# EAGLE board untitled (EAGLE 9.5.2)
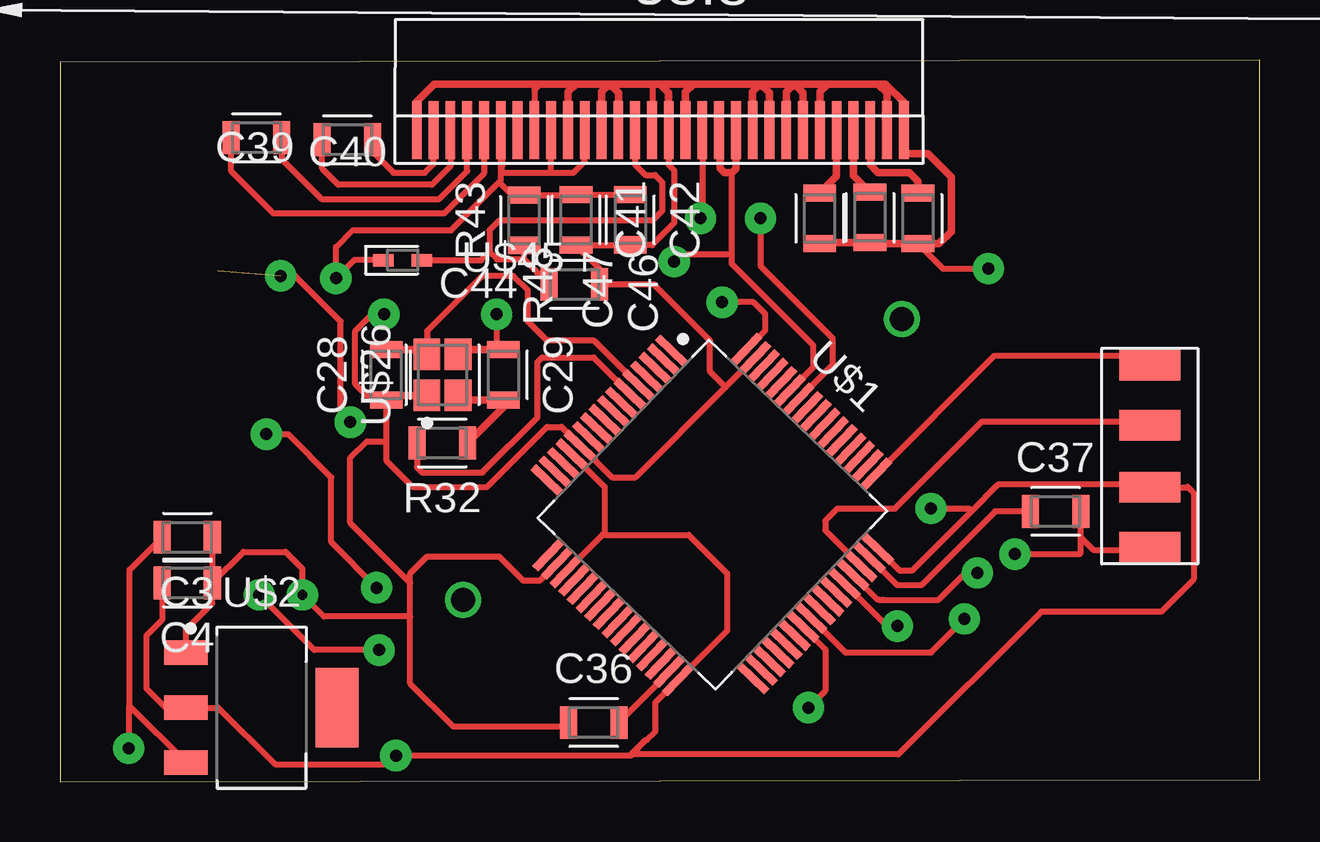
[diagram p0: board, top side]
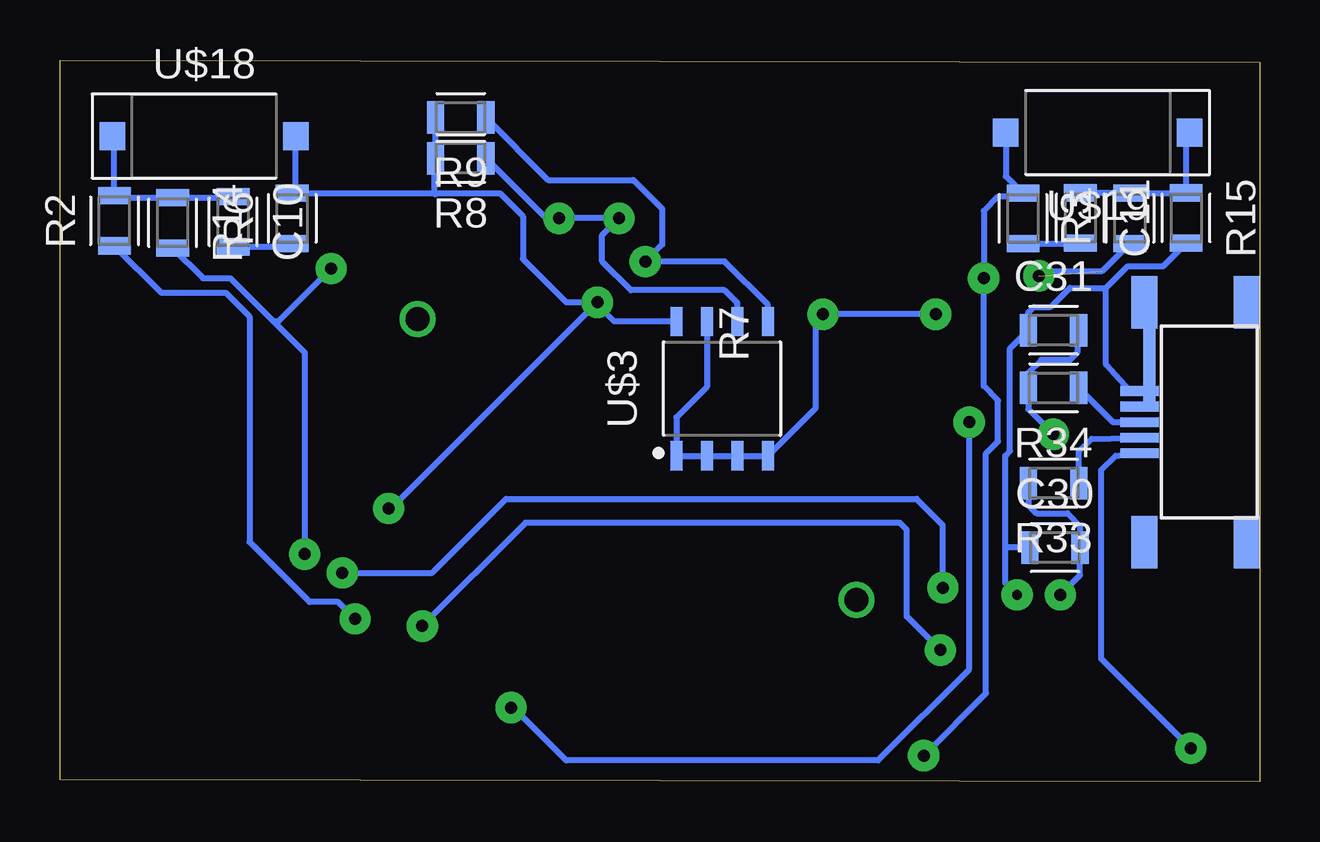
[diagram p1: board, bottom side, seen from below]

Size 50 x 30.1 mm. Coordinates in mm from the lower left corner, seen from the top.
Outline: 0,0 50,0.1 50,30.1 0,30 0,0
Copper layers (1*16): Top 0.035mm / dielectric 1.5mm / Bottom 0.035mm
Design rules "default": minimum track width 6mil, minimum drill 0.35mm, track to track 6mil, track to pad 6mil, pad to pad 6mil, via to via 6mil, smd to smd 6mil, copper to edge 40mil, drill to drill 6mil, minimum pad ring 10mil, minimum via ring 8mil, stop-mask expansion 4mil, vias tented up to drill 0mil, thermal gap 10mil

## Footprints (pad centres in the part's own frame; a part is rotated, then mirrored left to right if it is on the bottom)
0805 = smd 0.712 x 1.362: 1 -1.05,0; 2 1.05,0
QFP64 = smd 1.592 x 0.332: 1 -5.96,3.75; 2 -5.96,3.25; 3 -5.96,2.75; 4 -5.96,2.25; 5 -5.96,1.75; 6 -5.96,1.25; 7 -5.96,0.75; 8 -5.96,0.25; 9 -5.96,-0.25; 10 -5.96,-0.75; 11 -5.96,-1.25; 12 -5.96,-1.75; 13 -5.96,-2.25; 14 -5.96,-2.75; 15 -5.96,-3.25; 16 -5.96,-3.75; 33 5.96,-3.75; 34 5.96,-3.25; 35 5.96,-2.75; 36 5.96,-2.25; 37 5.96,-1.75; 38 5.96,-1.25; 39 5.96,-0.75; 40 5.96,-0.25; 41 5.96,0.25; 42 5.96,0.75; 43 5.96,1.25; 44 5.96,1.75; 45 5.96,2.25; 46 5.96,2.75; 47 5.96,3.25; 48 5.96,3.75 | smd 0.332 x 1.592: 17 -3.75,-5.96; 18 -3.25,-5.96; 19 -2.75,-5.96; 20 -2.25,-5.96; 21 -1.75,-5.96; 22 -1.25,-5.96; 23 -0.75,-5.96; 24 -0.25,-5.96; 25 0.25,-5.96; 26 0.75,-5.96; 27 1.25,-5.96; 28 1.75,-5.96; 29 2.25,-5.96; 30 2.75,-5.96; 31 3.25,-5.96; 32 3.75,-5.96; 49 3.75,5.96; 50 3.25,5.96; 51 2.75,5.96; 52 2.25,5.96; 53 1.75,5.96; 54 1.25,5.96; 55 0.75,5.96; 56 0.25,5.96; 57 -0.25,5.96; 58 -0.75,5.96; 59 -1.25,5.96; 60 -1.75,5.96; 61 -2.25,5.96; 62 -2.75,5.96; 63 -3.25,5.96; 64 -3.75,5.96
SOT229P729X180-4N = smd 1.803 x 1.012: 1 -3.15,2.29; 2 -3.15,0; 3 -3.15,-2.29 | smd 1.803 x 3.322: 4 3.15,0
SOIC127P600X175-8N = smd 1.212 x 0.502: 1 -2.8,1.905; 2 -2.8,0.635; 3 -2.8,-0.635; 4 -2.8,-1.905; 5 2.8,-1.905; 6 2.8,-0.635; 7 2.8,0.635; 8 2.8,1.905
USBT = smd 2.184 x 1.067: P$1 5,1.57; P$2 -5,1.57; P$3 -5,-2.7; P$4 5,-2.7 | smd 0.406 x 0.813: P$5 0,-2.5; P$6 -0.65,-2.5; P$7 0.65,-2.5; P$8 1.3,-2.5; P$9 -1.3,-2.5; P$10 0,-3.3; P$11 -0.65,-3.3; P$12 -1.3,-3.3; P$13 0.65,-3.3; P$14 1.3,-3.3 | smd 1.016 x 0.508: P$15 -1.35,-2.5; P$16 -2.35,-2.5; P$17 -3.35,-2.5; P$18 -4.1,-2.5
BUTTON = smd 1.062 x 1.172: 1 -3.825,0; 2 3.825,0
NX2520SA = smd 1.312 x 1.112: 1 -0.85,0.65; 2 -0.85,-0.65; 3 0.85,-0.65; 4 0.85,0.65
SSD1306 = smd 0.406 x 0.813: 1 -10.1,-0.4; 2 -9.4,-0.4; 3 -8.7,-0.4; 4 -8,-0.4; 5 -7.3,-0.4; 6 -6.6,-0.4; 7 -5.9,-0.4; 8 -5.2,-0.4; 9 -4.5,-0.4; 10 -3.8,-0.4; 11 -3.1,-0.4; 12 -2.4,-0.4; 13 -1.7,-0.4; 14 -1,-0.4; 15 -0.3,-0.4; 16 0.4,-0.4; 17 1.1,-0.4; 18 1.8,-0.4; 19 2.5,-0.4; 20 3.2,-0.4; 21 3.9,-0.4; 22 4.6,-0.4; 23 5.3,-0.4; 24 6,-0.4; 25 6.7,-0.4; 26 7.4,-0.4; 27 8.1,-0.4; 28 8.8,-0.4; 29 9.5,-0.4; 30 10.2,-0.4; P$1 -10.1,0.4; P$2 -9.4,0.4; P$3 -8.7,0.4; P$4 -8,0.4; P$5 -7.3,0.4; P$6 -6.6,0.4; P$7 -5.9,0.4; P$8 -5.2,0.4; P$9 -4.5,0.4; P$10 -3.8,0.4; P$11 -3.1,0.4; P$12 -2.4,0.4; P$13 -1.7,0.4; P$14 -1,0.4; P$15 -0.3,0.4; P$16 0.4,0.4; P$17 1.1,0.4; P$18 1.8,0.4; P$19 2.5,0.4; P$20 3.2,0.4; P$21 3.9,0.4; P$22 4.6,0.4; P$23 5.3,0.4; P$24 6,0.4; P$25 6.7,0.4; P$26 7.4,0.4; P$27 8.1,0.4; P$28 8.8,0.4; P$29 9.5,0.4; P$30 10.2,0.4; P$31 -10.1,1.2; P$32 -9.4,1.2; P$33 -8.7,1.2; P$34 -8,1.2; P$35 -7.3,1.2; P$36 -6.6,1.2; P$37 -5.9,1.2; P$38 -5.2,1.2; P$39 -4.5,1.2; P$40 -3.8,1.2; P$41 -3.1,1.2; P$42 -2.4,1.2; P$43 -1.7,1.2; P$44 -1,1.2; P$45 -0.3,1.2; P$46 0.4,1.2; P$47 1.1,1.2; P$48 1.8,1.2; P$49 2.5,1.2; P$50 3.2,1.2; P$51 3.9,1.2; P$52 4.6,1.2; P$53 5.3,1.2; P$54 6,1.2; P$55 6.7,1.2; P$56 7.4,1.2; P$57 8.1,1.2; P$58 8.8,1.2; P$59 9.5,1.2; P$60 10.2,1.2
ESD = smd 0.862 x 0.512: 1 -0.8,0; 2 0.8,0
SWD = smd 1.27 x 2.54: P$5 -3.8,0; P$6 -1.3,0; P$7 1.3,0; P$8 3.8,0

## Placement (x,y rotation side)
C3  10мкф  [0805]  5.3,10.2 180 top
C4  22мкф  [0805]  5.3,8.3 180 top
C10  100нф  [0805]  42.78,23.36 270 bottom
C11  100нф  [0805]  7.47,23.51 270 bottom
C28  8пф  [0805]  13.6,16.97 90 top
C29  8пф  [0805]  18.48,16.97 270 top
C30  47пф  [0805]  8.53,9.77 0 bottom
C31  47пф  [0805]  8.59,18.83 0 bottom
C36  2.2мкф  [0805]  22.24,2.48 0 top
C37  2.2мкф  [0805]  41.49,11.28 0 top
C39  1мкф  [0805]  11.98,26.78 180 top
C40  1мкф  [0805]  8.19,26.86 180 top
C41  1мкф  [0805]  21.51,23.43 270 top
C42  1мкф  [0805]  23.77,23.44 270 top
C44  4.7мкф  [0805]  21.44,20.74 0 top
C46  2.2мкф  [0805]  35.76,23.49 90 top
C47  4.7мкф  [0805]  33.76,23.54 90 top
R2  330  [0805]  47.73,23.4 90 bottom
R3  330  [0805]  5.41,23.5 90 bottom
R6  100  [0805]  40.32,23.49 90 bottom
R7  100  [0805]  9.86,23.49 90 bottom
R8  10к  [0805]  33.3,26 180 bottom
R9  10к  [0805]  33.3,27.7 180 bottom
R14  220k  [0805]  45.3,23.31 270 bottom
R15  220k  [0805]  3.06,23.51 270 bottom
R32  820  [0805]  15.93,14.13 180 top
R33  22  [0805]  8.58,12.46 180 bottom
R34  22  [0805]  8.59,16.43 180 bottom
R43  4.7к  [0805]  19.35,23.42 90 top
R48  910к  [0805]  31.66,23.49 90 top
U$1  STM32F215RE  [QFP64]  27.19,11.15 316.1 top
U$2  AMS1117  [SOT229P729X180-4N]  8.4,3.1 0 top
U$3  I2CMEMORY  [SOIC127P600X175-8N]  22.4,16.4 90 bottom
U$4  USBUSBT  [USBT]  2.1,15 270 bottom
U$18  BUTTON  [BUTTON]  43.99,26.93 0 bottom
U$19  BUTTON  [BUTTON]  6.75,27.07 180 bottom
U$26  NX2520SA  [NX2520SA]  15.94,16.97 90 top
U$38  SSD1306  [SSD1306]  24.97,26.78 0 top
U$45  ESD  [ESD]  14.28,21.75 0 top
U$49  SWD  [SWD]  45.42,13.58 90 top

## Library data of the parts
C3 C4 C10 C11 C28-C31 C36 C37 C39-C42 C44 C46 C47 R2 R3 R6-R9 R14 R15 R32-R34 R43 R48 U$1-U$4 U$18 U$19 U$26 U$38 U$45 U$49 = IDMLib

## Nets
+3V3: C4.2 C41.1 C42.1 R6.2 R7.2 R8.2 R9.2 R43.2 U$1.13 U$1.19 U$1.32 U$1.48 U$1.64 U$2.2 U$3.8 U$18.2 U$19.2 U$38.6 U$38.9 U$38.11 U$45.1 U$49.P$6
GND: C3.1 C4.1 C28.1 C29.1 C30.1 C31.1 C36.1 C37.2 C41.2 C42.2 C44.2 C46.1 C47.1 R14.2 R15.2 R48.1 U$1.12 U$1.18 U$1.63 U$2.1 U$3.1 U$3.2 U$3.3 U$3.4 U$3.7 U$4.P$12 U$26.1 U$26.3 U$38.1 U$38.8 U$38.10 U$38.12 U$38.13 U$38.15 U$38.16 U$38.17 U$38.21 U$38.22 U$38.23 U$38.24 U$38.25 U$38.29 U$38.30 U$49.P$5
N$1: C30.2 R33.2 U$1.44
N$5: C11.1 R3.2 R15.1 U$19.1
N$6: C11.2 R7.1
N$7: C10.1 R2.2 R14.1 U$18.1
N$8: C10.2 R6.1
N$17: R32.2 U$1.6
N$18: C28.2 U$1.5 U$26.4
N$19: C29.2 R32.1 U$26.2
N$21: C31.2 R34.2 U$1.45
N$22: C36.2 U$1.31
N$23: R33.1 U$4.P$13
N$24: R34.1 U$4.P$10
N$25: C37.1 U$1.47
N$28: R3.1 U$1.39
N$29: R2.1 U$1.40
N$34: C39.1 U$38.2
N$35: C39.2 U$38.3
N$36: C40.1 U$38.4
N$37: C40.2 U$38.5
N$38: C44.1 R43.1 U$38.14 U$45.2
N$40: C3.2 U$2.3 U$4.P$14
N$43: R48.2 U$38.26
N$44: C47.2 U$38.27
N$45: C46.2 U$38.28
N$47: R9.1 U$1.59 U$3.5 U$38.19 U$38.20
N$48: R8.1 U$1.58 U$3.6 U$38.18
N$51: U$1.49 U$49.P$8
N$52: U$1.46 U$49.P$7
VBAT: U$1.1

## Tracks (layer width: path | path; a pad name or v marks a point on that pad's centre or on a via)
+3V3  (via drill 0.5 pad 1.3)
  Top 0.254: U$1.48 35,8.8 35.5,8.8 38,11.3 | U$1.13 22.69,12.3 22.7,12.3 22.7,10.39 U$1.19 22.61,10.3 26.2,10.3 27.8,8.7 27.8,6.3 U$1.32 24.8,3.3 24.8,2.1 24.45,1.75 | v36.3,11.4 37.9,11.4 38,11.3 | U$49.P$6 45.6,12.28 45.58,12.3 | 38,11.3 39.1,12.4 45.4,12.4 U$49.P$6 | C41.1 C42.1 | 18.3,25 16.3,23 12.2,23 11.5,22.3 v11.5,21 12.25,21.75 U$45.1 | 18.3,25 18.38,25.08 18.38,25.3 | 18.38,25.3 18.38,25.5 | 18.38,25.5 U$38.6 | 18.4,25.7 18.4,25.33 18.38,25.3 | 18.38,25.5 18.48,25.4 20.5,25.4 | 20.5,25.4 21.4,25.4 21.87,25.87 U$38.11 | 20.5,25.4 20.47,25.43 U$38.9 | C41.1 R43.2 18.83,24.47 18.3,25 | U$1.64 29.4,18.83 29.4,19.5 28.9,20 v27.6,20 | C4.2 4.25,6.75 3.6,6.1 3.6,3.9 4.4,3.1 U$2.2 6.6,3.1 8.96,0.74 13.64,0.74 v14,1.1 23.8,1.1 24.45,1.75 | U$49.P$6 46.98,12.28 47,12.3 47.25,12.05 47.25,8.45 45.9,7.1 40.9,7.1 34.94,1.14 23.8,1.14 24.41,1.75 24.45,1.75
  Top 0.305: U$38.6 18.4,26.35 18.4,25.7 | C41.1
  Bottom 0.254: v36.3,11.4 36.2,11.4 v27.6,20 27.7,20 | 40.18,26.95 40.18,24.68 R6.2 34.4,24.54 | U$19.2 10.58,25.26 R7.2 10,24.4 10.9,24.4 11.5,23.8 v11.5,21 11.5,16.5 10.9,15.9 10.9,14.2 11.4,13.7 11.4,3.7 v14,1.1 | 27.7,20 28.9,20 30.7,21.8 30.7,23.58 31.66,24.54 34.4,24.54 | 34.35,24.49 34.4,24.54 | 34.4,24.54 34.4,25.95 R8.2 R9.2 | U$3.8 26.9,19.2 27.7,20
  Bottom 0.305: 10.56,27.05 U$19.2 | 40.18,26.95 U$18.2
GND  (via drill 0.4 pad 1.3, 0.5 pad 1.3)
  Top 0.254: 13.6,14.2 C28.1 12.98,15.92 12.3,16.6 12.3,18.8 13,19.5 v13.5,19.5 | 13.6,14.2 13.6,13.4 14.7,12.3 17.8,12.3 20.3,14.8 20.9,14.8 U$1.12 | U$1.12 | U$1.12 21.73,14.02 22.3,13.45 | C46.1 36.8,21.4 v38.7,21.4 | v39.8,9.5 42.5,9.5 42.54,9.54 42.54,10.2 | 42.54,10.2 C37.2 | v18.2,19.5 18.2,18.3 C29.1 | C36.1 21.01,2.3 16.4,2.3 14.6,4.1 14.6,6.9 | 14.6,6.9 14.6,8.3 | 14.6,8.3 14.6,8.7 15.3,9.4 18.3,9.4 19.3,8.4 20,8.4 U$1.18 | U$1.12 23,12.7 23.98,12.7 27.74,16.46 | 27.74,16.46 U$1.63 | 42.54,10.2 43.06,9.68 45.32,9.68 U$49.P$5 45.52,9.65 | 19.77,26.49 U$38.8 19.77,28.87 20,29.1 | 26,26.31 U$38.17 | 21.79,22.1 22.49,21.4 C44.2 24.76,20.74 27.1,18.4 27.1,17.1 27.74,16.46 | C41.2 C42.2 | C42.2 | 24.6,26.49 24.6,26.45 U$38.15 24.7,26.41 24.7,29.1 | U$38.16 25.37,25.73 25.6,25.5 25.6,23.3 24.68,22.38 C42.2 | 13.6,14.2 12.8,14.2 12.1,13.5 12.1,10.8 14.6,8.3 | 14.6,6.9 11,6.9 v10.1,7.8 10.1,8.9 9.4,9.6 7.65,9.6 C4.1 | C3.1 C4.1 | U$2.1 5.25,6.35 6.35,7.45 C4.1
  Top 0.305: U$38.1 14.87,28.37 15.6,29.1 20,29.1 21.5,29.1 | 21.5,29.1 22.9,29.1 | 22.8,29 23,29 | 22.9,29.1 24.7,29.1 25,29.1 | 25,29.1 26.4,29.1 | 26.4,29.1 29.2,29.1 | 29.1,29 29.3,29 | 29.2,29.1 30.6,29.1 | 30.5,29 30.7,29 | 30.6,29.1 32,29.1 | 32,29.1 34.1,29.1 | 34.1,29.1 34.4,29.1 35.17,28.33 U$38.30 35.35,26.2 36.17,26.2 37.15,25.22 37.15,22.95 36.64,22.44 C46.1 33.81,22.44 | U$38.10 21.17,28.77 21.5,29.1 | U$38.12 22.57,28.77 22.8,29 | 22.8,29 22.9,29.1 | U$38.13 23.27,28.73 23,29 | 23,29 22.9,29.1 | U$38.16 25.37,28.73 25,29.1 | U$38.17 26.07,28.77 26.4,29.1 | U$38.21 28.87,28.77 29.1,29 | 29.1,29 29.2,29.1 | U$38.22 29.57,28.73 29.3,29 | 29.3,29 29.2,29.1 | U$38.24 30.97,28.73 30.7,29 | 30.7,29 30.6,29.1 | U$38.23 30.27,28.77 30.5,29 | 30.5,29 30.6,29.1 | U$38.25 31.67,28.77 32,29.1 | U$38.29 34.47,28.73 34.1,29.1 | 33.81,22.44 C47.1 31.71,22.49 R48.1 | 33.76,22.39 33.81,22.44 | C44.2 22.49,21 | 21.79,22.1 C41.2 | U$26.3 16.79,18.02 C29.1 18.88,18.02 | U$26.1 13.8,16.12 C28.1 | 42.6,11.34 C37.2
  Bottom 0.254: 13.5,19.7 v13.5,19.5 v18.2,19.5 18.5,19.2 18.5,15.6 U$3.4 U$3.3 U$3.2 U$3.1 24.3,15.2 23.03,16.47 U$3.7 | R15.2 4.02,21.5 5.5,21.5 6.4,20.6 | R14.2 44.04,21 42.9,21 41.1,19.2 | v38.7,21.4 40.9,19.2 41.1,19.2 | 41.1,19.2 39.8,17.9 v39.8,9.5 | 6.4,20.6 7.9,20.6 8.7,19.8 9.4,19.8 9.64,19.56 C31.1 10.4,18.07 10.4,13.8 10.6,13.6 10.6,9.7 | v10.1,7.8 10.6,8.3 10.6,9.7 | C30.1 10.53,9.77 10.6,9.7 | 6.4,20.6 6.4,17.4 U$4.P$12
N$1  (via drill 0.5 pad 1.3)
  Top 0.254: v8.3,7.8 10.6,5.5 v13.3,5.5 | v34.9,6.5 34.47,6.5 U$1.44
  Bottom 0.254: R33.2 9.63,11.53 9.3,11.2 8,11.2 7.48,10.68 C30.2 7.48,8.62 v8.3,7.8 | v13.3,5.5 14.7,6.9 14.7,10.5 15,10.8 30.6,10.8 v34.9,6.5
N$2  (via drill 1 pad 1.3)
  other vias: 16.8,7.6
N$4  (via drill 1 pad 1.3)
  other vias: 35.1,19.3
N$5
  Bottom 0.254: C11.1 R3.2 R15.1 3.06,26.94 U$19.1
  Bottom 0.305: R3.2 5.44,24.58
N$6
  Bottom 0.254: R7.1 7.49,22.44 C11.2
N$7
  Bottom 0.254: U$18.1 47.73,26.85 R2.2 47.64,24.36 R14.1 42.83,24.36 C10.1
N$8
  Bottom 0.254: C10.2 40.45,22.31 R6.1
N$17
  Top 0.254: R32.2 14.88,13.12 15.1,12.9 17.6,12.9 19.9,15.2 19.9,15.5 19.9,16 19.9,17.5 20.1,17.7 22.24,17.7 U$1.6
N$18
  Top 0.254: U$26.4 15.29,18.79 17.6,21.1 18.9,21.1 19.5,20.5 19.5,19.2 20.3,18.4 22.25,18.4 U$1.5
  Top 0.305: C28.2 15.09,18.02 | 15.09,18.02 U$26.4 | 15.03,18.08 15.09,18.02
N$19
  Top 0.305: U$26.2 16.79,15.92 C29.2 18.48,15.63 R32.1
N$21  (via drill 0.5 pad 1.3)
  Top 0.254: v13.2,8.1 11.3,10 11.3,12.7 9.5,14.5 v8.6,14.5 | 33.12,8.64 U$1.45 34.08,7.6 34.16,7.6 34.3,7.6 36.61,7.6 37.73,8.72 v38.23,8.72
  Bottom 0.254: v13.2,8.1 13.2,10.7 14.3,11.8 31.4,11.8 34.48,8.72 v38.23,8.72 | C31.2 7.6,18.77 7.6,17.9 7.9,17.6 9.1,17.6 9.64,17.06 R34.2 9.64,15.54 v8.6,14.5
N$22
  Top 0.254: C36.2 25.4,4.59 U$1.31
N$23
  Bottom 0.254: R33.1 7.53,13.77 7,14.3 U$4.P$13
N$24
  Bottom 0.254: R34.1 6.11,15 U$4.P$10
N$25
  Top 0.254: C37.1 38.98,11.28 35.9,8.2 34.89,8.2 U$1.47
  Top 0.305: C37.1 40.28,11.44
N$28  (via drill 0.5 pad 1.3)  (1 unrouted)
  Top 0.254: 31.2,6.2 30.96,6.44 U$1.39 31.9,5.54 31.9,3.8 v31.2,3.1 | v12.1,15 11.7,15.4 11.7,19.2 9.8,21.1 v9.2,21.1
  Bottom 0.254: v31.2,3.1 31.1,3.1 28.9,0.9 15.9,0.9 12.1,4.7 v12.1,15 12.1,15.1 | R3.1 6.56,21.3 9,21.3 v9.2,21.1
N$29  (via drill 0.5 pad 1.3)
  Top 0.254: 31.54,6.6 U$1.40 32.74,5.4 36.3,5.4 v37.7,6.8
  Bottom 0.254: v37.7,6.8 38.4,7.5 39.6,7.5 42.1,10 42.1,19.4 43.1,20.4 45.78,20.4 R2.1
N$34
  Top 0.254: C39.1 13.03,26.27 13.9,25.4 15.2,25.4 15.57,25.77 U$38.2
N$35
  Top 0.254: U$38.3 16.27,25.67 15.5,24.9 11.6,24.9 10.93,25.57 C39.2
N$36
  Top 0.254: C40.1 9.24,25.96 10.9,24.3 15.8,24.3 16.97,25.47 U$38.4
N$37
  Top 0.254: U$38.5 17.67,25.37 16,23.7 8.9,23.7 7.14,25.46 C40.2
N$38
  Top 0.254: C44.1 19.34,21.79 | 19.34,21.79 R43.1 | U$38.14 23.97,25.73 24.4,25.3 24.8,25.3 25.1,25 25.1,23.8 24.7,23.4 18.3,23.4 17.9,23 17.9,22.1 | 17.9,22.1 18.21,21.79 19.34,21.79 | U$45.2 17.55,21.75 17.9,22.1
  Top 0.305: 19.17,22.19 R43.1 | C44.1 20.28,20.74
N$40  (via drill 0.5 pad 1.3)
  Top 0.254: U$2.3 2.9,3.16 | 2.9,3.16 2.9,8.85 C3.2 | 2.9,3.16 2.87,3.13 v2.87,1.4
  Bottom 0.254: v2.87,1.4 6.6,5.13 6.6,13 6,13.6 U$4.P$14
N$43
  Top 0.305: R48.2 32.37,25.25 U$38.26
N$44
  Top 0.305: U$38.27 33.07,25.28 C47.2
N$45
  Top 0.305: U$38.28 33.77,25.73 34.1,25.4 35.4,25.4 35.76,25.04 C46.2
N$47  (via drill 0.5 pad 1.3)
  Top 0.254: U$1.59 31.4,17.29 31.4,18.2 28,21.6 28,22 | 28,22 28,25.4 | v25.6,21.7 25.9,22 28,22
  Top 0.305: U$38.19 27.5,26.35 27.5,25.6 27.7,25.4 28,25.4 28.17,25.57 U$38.20
  Bottom 0.254: R9.1 29.65,25.1 26.1,25.1 24.9,23.9 24.9,22.4 v25.6,21.7 22.3,21.7 20.49,19.9 U$3.5
N$48  (via drill 0.5 pad 1.3)
  Top 0.254: U$38.18 26.77,23.57 v26.7,23.5 | v29.2,23.5 29.2,21.5 32.2,18.5 32.2,17.39 U$1.58
  Bottom 0.254: R8.1 29.75,23.5 v29.2,23.5 v26.7,23.5 27.4,22.8 27.4,21.7 26.2,20.5 22.3,20.5 21.77,19.97 U$3.6
N$51
  Top 0.254: 45.31,17.29 U$49.P$8 45.5,17.3 46.2,17.3 45.73,17.77 38.95,17.77 U$1.49
N$52
  Top 0.254: U$1.46 31.9,10.49 31.9,10.9 32.4,11.4 34.8,11.4 38.42,15.02 45.18,15.02 45.38,14.82 U$49.P$7